# Altium PCB 400250.PcbDoc (part 2 of 2)
Units mil, origin at the board's own origin, x right, y up, seen from the top; angles counter-clockwise.
Board outline 1812.55 x 600 mil, 2 copper layers (Top Layer, Bottom Layer), stack 80.158 mil thick; 97 components, 62 nets, 288 pads, 110 vias.
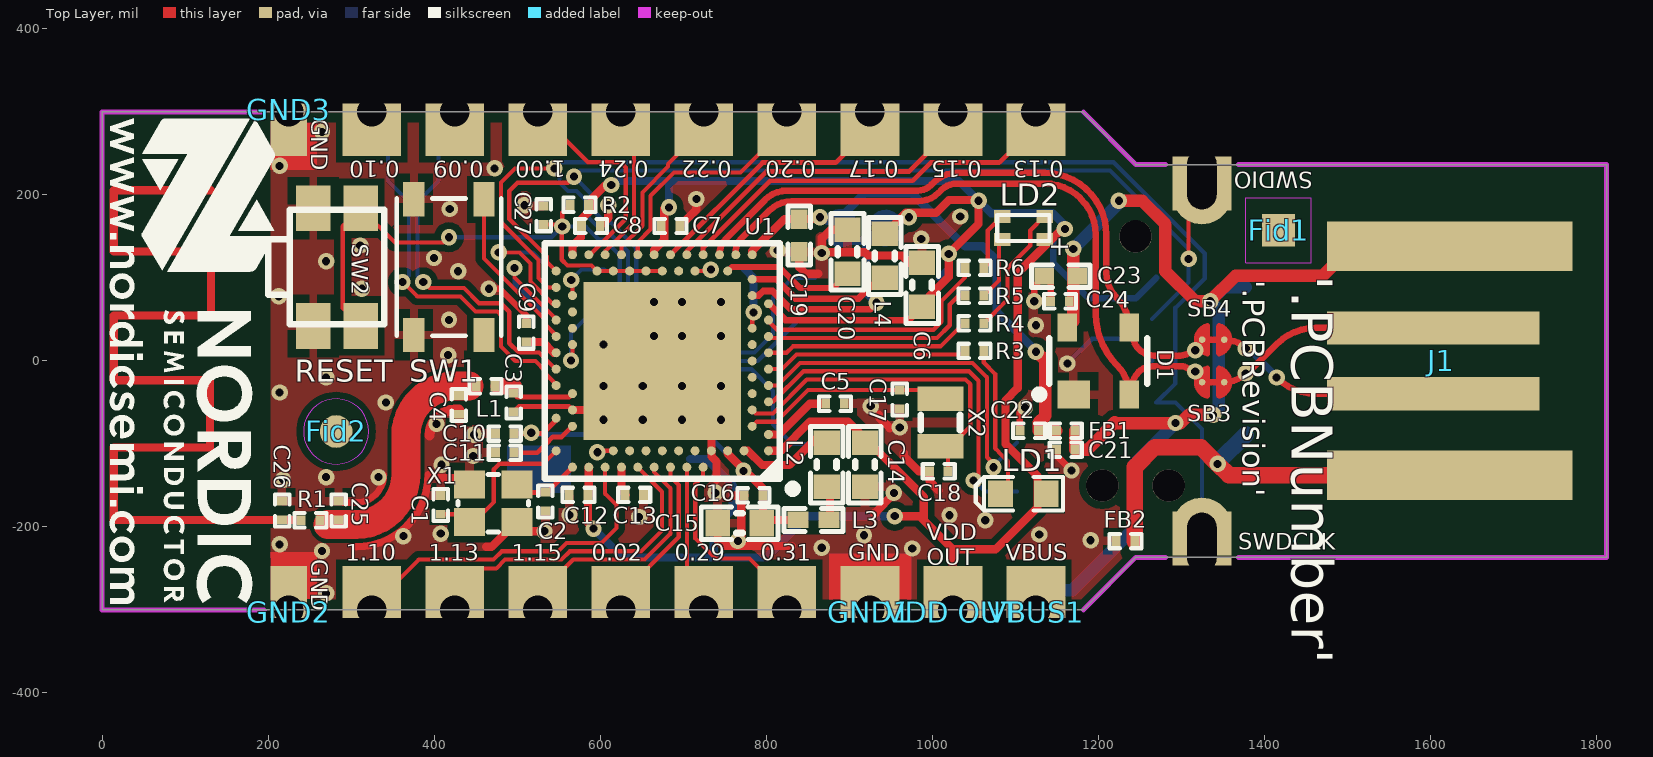
[diagram p0: Top Layer view]

## Via types
v1: diameter 19.68, hole 9.84, Top Layer to Bottom Layer, tented both sides, 110 vias

## Nets (pads, with @x,y where several pads share a name; then routed paths per layer and width w, separated by ;. In a path a pad name is that pad's centre, name@x,y a point inside that pad or via, vN(x,y) a via of type N, cw(c..) or ccw(c..) an arc to the next point about the centre after c; other vN are vias at no path point) (continued)
VDD_nRF: "VDD nRF.1" "VDD OUT.1" C6.1 C7.1 C8.1 C12.1 C14.1 J2.1 L4.1 LD1.2 LD2.4 P1.1 R2.2 SB1.1 U1.A22 U1.AD14 U1.AD23 U1.B1 U1.W1 | length 3081
  Top Layer w8: U1.W1 803.65,68.9 823.43,49.11 972.11,49.11 C6.1
  Top Layer w9.84: U1.AD23 566.73,138.31 577.22,148.8 C8.1@577.22,162.58 ; C8.1 577.78,170.78 590.24,183.24 590.24,195.69 606.55,212 v1(613.5,212) ; C12.1 585.38,-195.38 v1(592,-202) ; C12.1@586.42,-161.47 U1.A22 ; U1.AD14 665.16,133.74 677.22,145.8 v1@677.22,183.8 ; U1.B1 817.73,-108.27 853,-73 899,-73 990,-164 990,-192
  Top Layer w10: L4.1 968.23,178.39 1004.67,178.39 1020.13,193.84 1055.16,193.84 v1(1056,193) 1056,165 v1(1020,129) 1020,101 988,69 C6.1 ; v1(955,-187) 985,-187 1025,-227 ; 1025,-293 1025,-227 ; v1@1158.73,161.21 1103.16,105.64 1103.16,-32.84 1088.5,-47.5 1088.5,-99.96 1127,-138.46 1127,-176.46 1076.46,-227 1025,-227
  Bottom Layer w8: v1@1160,163 1146,149 1146,118 1188.5,75.5 1245.5,75.5 J2.1
  Bottom Layer w9.84: v1(613.5,212) 618.43,216.93 684,216.93 ; v1(683,185) 683,215.93 684,216.93 ; v1@1160,163 1145,178 1071,178 v1(1056,193) 1032.07,216.93 684,216.93
  Bottom Layer w10: v1(592,-202) 626.85,-236.85 737,-236.85 ; 708.66,-118.11 728.11,-118.11 760,-150 760,-178.58 737,-201.58 737,-236.85 ; SB1.1@946,172.3 971.3,172.3 v1(972,173) ; v1(955,-187) 850.05,-187 800.2,-236.85 737,-236.85 ; P1.1@1009.77,100 1020,110.23 v1(1020,129)
  other v1: 1160,159
XC1: C1.1 U1.B24 X1.1 | length 207.8
  Top Layer w5: C1.1 X1.1@452.8,-184.69 ; X1.1 447.89,-194.11 472,-170 472,-130.5 478.62,-123.88 531.44,-123.88 U1.B24
XC2: C2.1 U1.A23 X1.3 | length 83.5
  Top Layer w5.91: X1.3 509.12,-158.25 C2.1 536.43,-158.25 U1.A23
pads on no net: Fid1.0 Fid2.0 J2.0 J2.6 J2.7 J2.8 J2.9 J2.10 P1.6 P1.7 P1.8 SW1.0 U1.AC11 U1.B9 U1.B11 U1.B13 U1.B15 U1.B17 U1.H2 U1.K2 U1.M2 U1.P2 U1.T23 U1.V23

## Polygon pours and split planes (outlines as drawn)
GND on Bottom Layer "Bottom_Layer-GND" (solid, remove dead copper, pour order 37): -100,-400 -100,400 1900,400 1900,-400
GND on Top Layer "Top_Layer-GND" (solid, remove dead copper, pour order 39): -100,-402.58 -100,400 1900,400 1900,-402.58

## Keep-outs
Keep-Out Layer:
  lines w5.91: 1182.16,-300 1245.55,-236.61 1281,-236.61 ; 1182.16,300 1245.55,236.61 1281,236.61 ; 1369,-236.61 1812.55,-236.61 1812.55,236.61 1369,236.61
  lines w6: 195,-300 0,-300 0,300 195,300

## Other copper
Top Layer:
  rectangle net GND: 876,-287.15 975,-232
  rectangle net GND: 203,-287 259,-230
  rectangle net GND: 203,230 259,287
  pour cut-out: 935,-81.47 935,-140.53 836.57,-140.53 836.57,-81.47
  pour cut-out: 1198.41,-287.15 1198.41,-402.58 176.5,-402.58 176.5,-287.15
  pour cut-out: 184.75,287 184.75,314.42 1236,314.42 1236,287
  pour cut-out: 1261.37,-236.61 1261.37,236.61 1812.55,236.61 1812.55,-236.61
  pour cut-out: -20,358.42 203,358.42 203,-343.58 -20,-343.58
  pour cut-out: 435.8,12.79 543.8,12.79 543.8,-77.47 435.8,-77.47
  pour cut-out: 665.16,29.53 665.16,-29.53 566.73,-29.53 566.73,29.53
  pour cut-out: 573.69,156.99 615.45,115.23 545.85,45.63 504.09,87.39
Bottom Layer:
  rectangle net GND: 876,-287.15 975,-232
  rectangle net GND: 203,-287 259,-230
  rectangle net GND: 203,230 259,287
  rectangle net GND: 488,-159 565,-102
  pour cut-out: 1198.41,-287.15 1198.41,-402.58 166.25,-402.58 166.25,-287.15
  pour cut-out: 186.75,287 186.75,314.42 1236,314.42 1236,287
  pour cut-out: -20,358.42 203,358.42 203,-343.58 -20,-343.58

## Silkscreen, mask and mechanical layers (free items; w line width, h text height)
Top Overlay:
  drawing of 43 lines, arcs and shapes, not listed
  text "'.PCBNumber'" at 1417,103 h85 r270
  text "'.PCBRevision'" at 1374,97 h27 r270
  text "RESET" at 232,-25 h27
  text "VDD / OUT" at 993.75,-246 h20
Bottom Overlay:
  lines w7.87: 209.41,-98.43 ccw(c248.78,-98.43) 248.78,-137.8 445.63,-137.8 ccw(c445.63,-98.43) 485,-98.43 485,98.43 ccw(c445.63,98.43) 445.63,137.8 248.78,137.8 ccw(c248.78,98.43) 209.41,98.43 209.41,-98.43
  text "LABEL" at 328.41,-89.8 h40 r270
  text "VDD / nRF" at 674.68,-214.78 h20 r270
  text "nRF52840-Dongle" at 32,-283 h95 r270
Board Outline:
  the board outline again, w6
Bottom Assembly:
  drawing of 40 lines, arcs and shapes, not listed
Placement:
  lines w6: 1261.37,-236.61 1261.37,236.61

## Dimensions
1245.55,-236.61 to 1812.55,-236.61 on Dimension
0,-300 to 1812.55,-236.61 on Dimension
0,-300 to 1182.16,-300 on Dimension
1812.55,236.61 to 1812.55,-236.61 on Dimension
0,300 to 0,-300 on Dimension

## Text inside footprints (layer, text, board x,y; h text height)
J1: Placement "Card edge" at 1838.14,120.07 h62 r270; PCB Info "SEE DETAIL A" at 1766.24,967.55 h75 r270; PCB Info "0.025in [0.625mm]" at 3042.93,975.97 h90 r270; PCB Info "DETAIL A" at 4163.95,-1.71 h150 r270; PCB Info "o" at 3713.85,-860.96 h48 r270; PCB Info "45" at 3613.85,-698.46 h90 r270; PCB Info "0.030in [0.75mm]" at 2288.95,-751.71 h90 r270
LD2: Top Overlay "+" at 1164.13,123.58 h23.62 r90
P1: Bottom Overlay "1" at 999,138 h40 r270
"VDD nRF": Bottom Assembly "VDD / nRF" at 691.93,-189.96 h12 r270